# Altium PCB Hotels_Lock_Main_V1.PcbDoc (part 1 of 2)
Units mil, origin at the board's own origin, x right, y up, seen from the top; angles counter-clockwise.
Board outline 2496.06 x 2220.47 mil, 2 copper layers (Top Layer, Bottom Layer); 99 components, 77 nets, 283 pads, 104 vias.
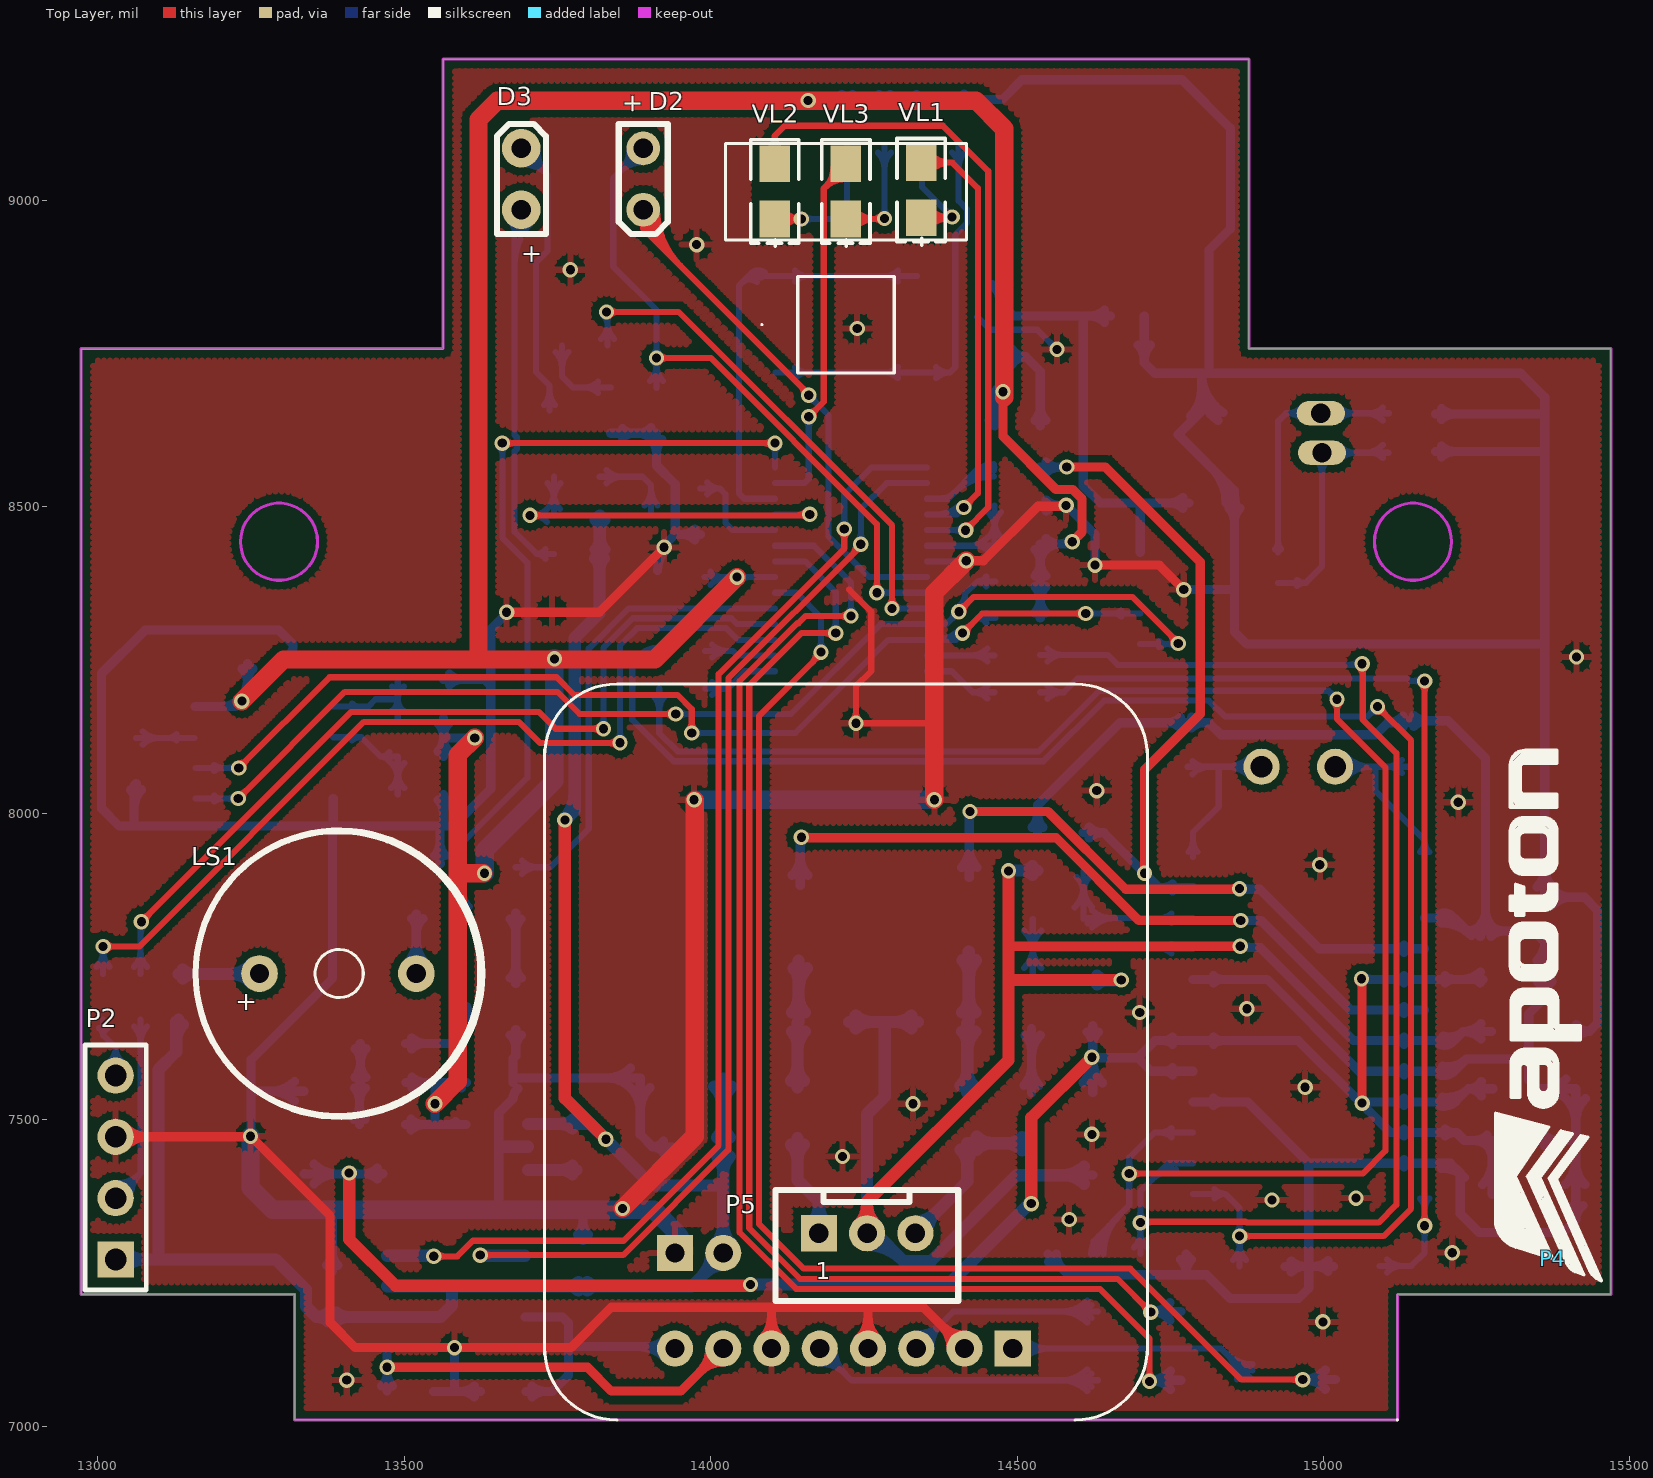
[diagram p0: Top Layer view]
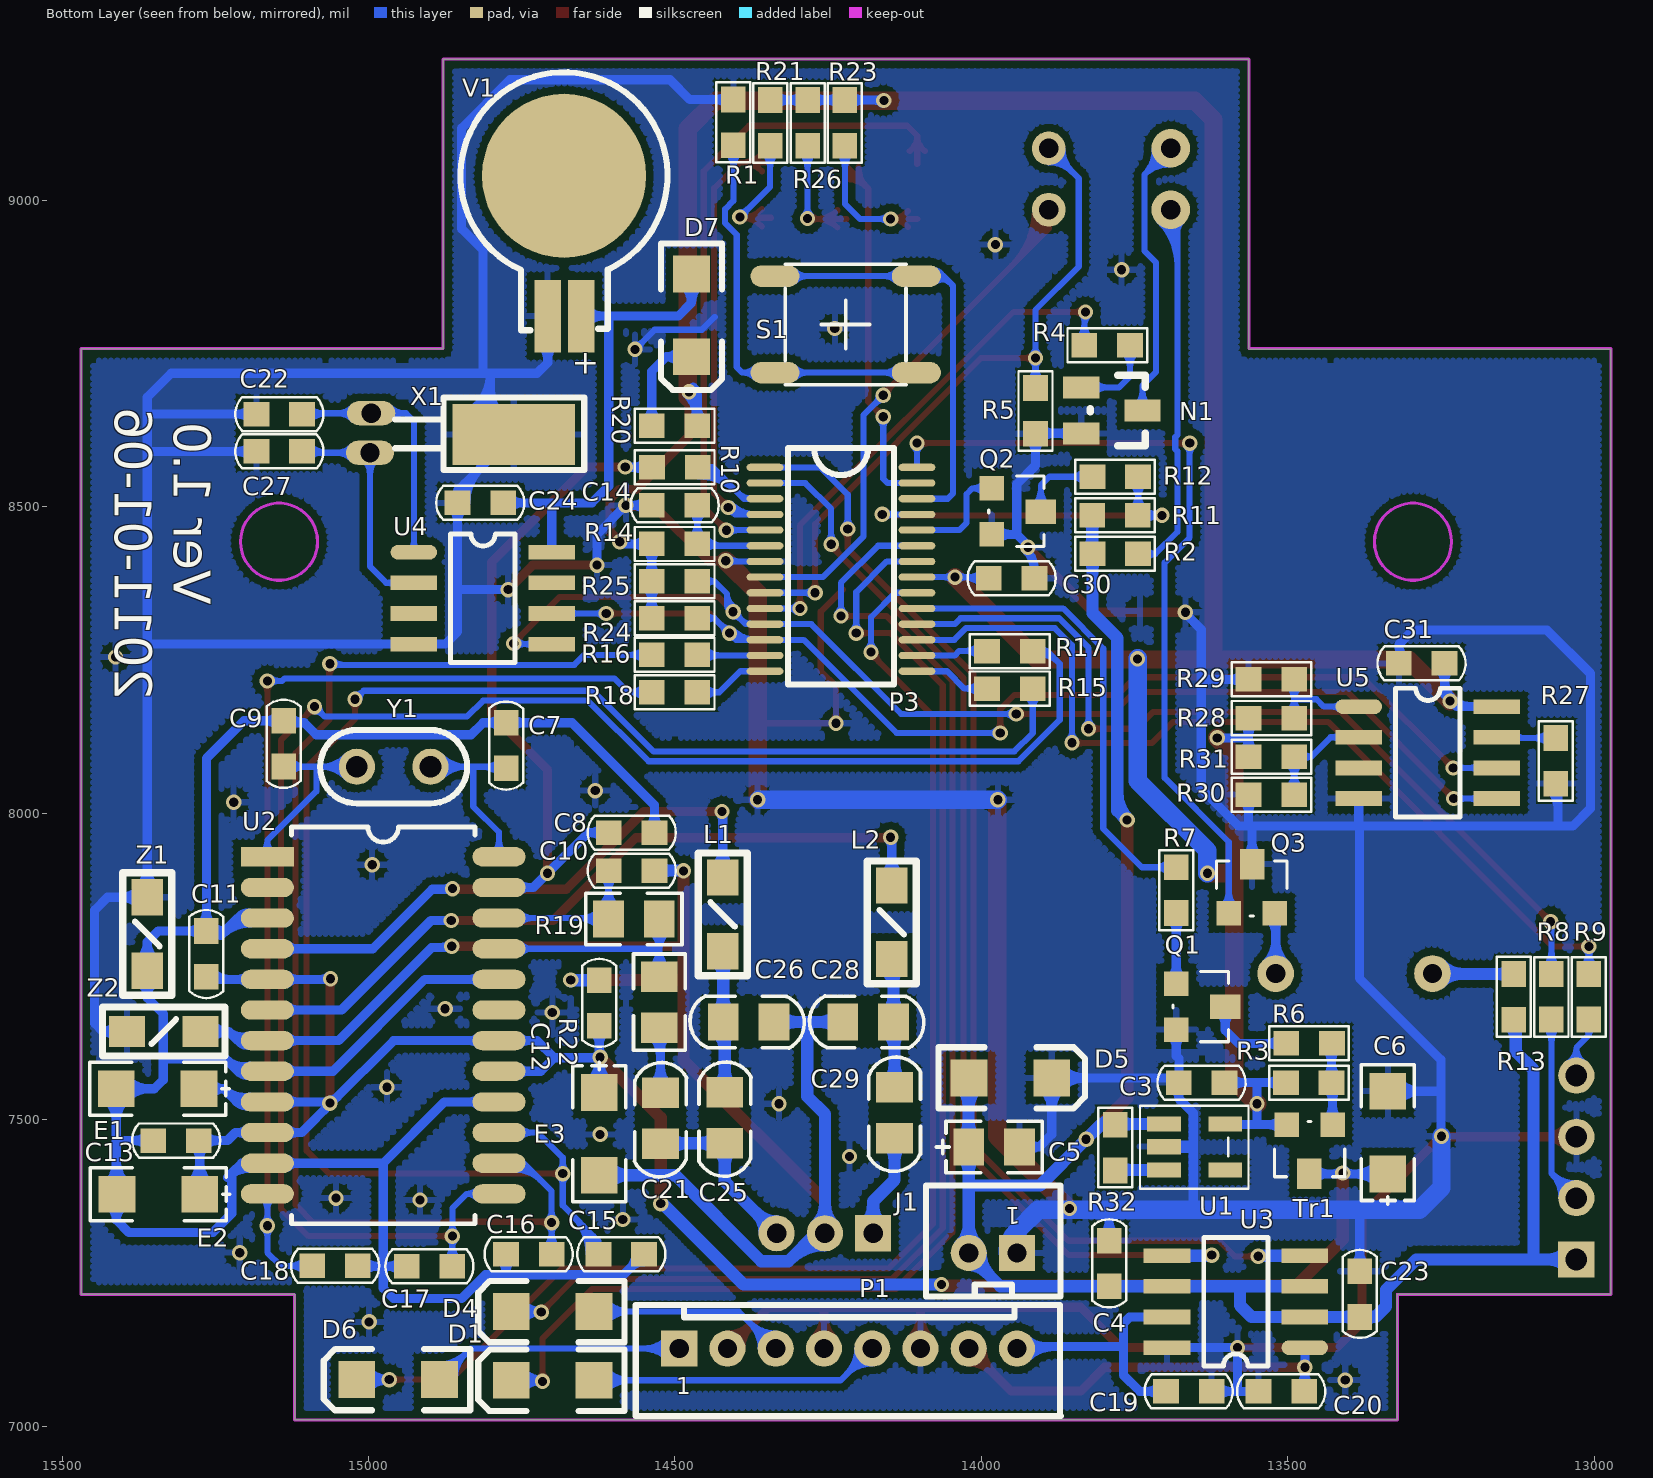
[diagram p1: Bottom Layer view, seen from below]

## Layer stack, top to bottom
Top Layer: signal copper 1.4
Dielectric: dielectric 12.6, FR-4, Dk 4.8
Bottom Layer: signal copper 1.4

## Board outline
13321.19,7010.06 13321.19,7214.79 12972.76,7214.79 12972.76,8757 13562.22,8757 13563.32,8758.09 13563.32,8826 13563.32,9230.54 14878.28,9230.54 14878.28,8758.09 15468.83,8758.09 15468.83,7214.79 15120.4,7214.79 15120.4,7010.06 13321.19,7010.06

## Design rules (kind name [scope] priority, off if disabled: settings)
Clearance Clearance_1 [InPolygon] p1: gap=12
Clearance [All] p2: gap=6
ComponentClearance [All] p1: gap=0 collisioncheckmode=3 verticalgap=0 showdistances=FALSE
FabricationTestPointUsage TestPointUsage [All] p1: valid=0 allowmultiple=FALSE
FabricationTestpoint Testpoint [All] p1: side=3 testpointundercomponent=TRUE minsize=40 maxsize=100 preferedsize=60 minholesize=0 maxholesize=40 preferedholesize=32 testpointgrid=1 allowsidetop=TRUE allowsidebottom=TRUE usegrid=TRUE gridtolerance=0.01
HoleToHoleClearance [All] p1: gap=0 allowstackedmicrovias=TRUE
MinimumSolderMaskSliver [All] p1: minsoldermaskwidth=0
PolygonConnect [All] p1: connectstyle=Relief reliefconductorwidth=10 reliefentries=4 polygonreliefangle="90 Angle"
RoutingVias [All] p1: holewidth=15 width=25 viastyle="Through Hole" minholewidth=5 minwidth=15 maxholewidth=28 maxwidth=50
SilkToSilkClearance [All] p1: silktosilkclearance=0
SilkscreenOverComponentPads [All] p1: minsilkscreentomaskgap=0
SolderMaskExpansion [All] p1: expansion=4
Width [All] p1: maxlimit=100 minlimit=6 preferedwidth=7
21 further rules are at their usual default settings.

## Components (designator, comment, footprint, x,y, rotation, side; value= is the part's Value field where it differs from the comment)
C3 "0.1uF" 0603C 13602,7559.87 r0 bottom
C4 "0.1uF" 0603C 13792,7227 r90 bottom
C5 "10uF" 0805EC 13979,7455 r180 bottom
C6 "10uF/16V" 1206EC 13337,7412 r90 bottom
C7 "15pF" 0603C 14775,8149 r270 bottom
C8 "330pF" 0603C 14609,7969 r180 bottom
C9 "15pF" 0603C 15138,8152 r270 bottom
C10 "0.01uF" 0603C 14609,7907 r180 bottom
C11 "0.1uF" 0603C 15264,7809 r270 bottom
C12 "0.1uF" 0603C 14624,7652 r90 bottom
C13 "0.1uF" 0603C 15352.44,7466.56 r180 bottom
C14 "1uF" 0603C 14538.94,8503 r180 bottom
C15 "330pF" 0603C 14626,7281.13 r180 bottom
C16 "330pF" 0603C 14700,7280 r0 bottom
C17 "330pF" 0603C 14862,7260 r0 bottom
C18 "330pF" 0603C 15093,7262 r180 bottom
C19 "0.1uF" 0603C 13623,7056 r0 bottom
C20 "0.1uF" 0603C 13472,7056 r0 bottom
C21 "47pF" 0805C 14524,7502 r270 bottom
C22 "10pF" 0603C 15184,8652 r180 bottom
C23 "0.1uF" 0603C 13383,7177 r90 bottom
C24 "2.2uF" 0603C 14779,8506 r0 bottom
C25 "30pF" 0805C 14419,7503 r270 bottom
C26 "68pF" 0805C 14380,7660 r0 bottom
C27 "10pF" 0603C 15184,8591 r180 bottom
C28 "68pF" 0805C 14185,7660 r0 bottom
C29 "30pF" 0805C 14142,7511 r270 bottom
C30 "0.1uF" 0603C 13989,8384 r180 bottom
C31 "0.1uF" 0603C 13243,8244 r0 bottom
D1 "4148" 1206D_1 14767,7075 r180 bottom
D2 "LED" LED1_R 13890,9083 r270 top locked
D3 "LED" LED1_S 13692,8985 r90 top locked
D4 "4148" 1206D_1 14767,7187 r180 bottom
D5 "DIODE" 1206D_1 13885,7568 r0 bottom
D6 "4148" 1206D_1 15019,7076 r180 bottom
D7 "4148" 1206D_1 14473,8745 r90 bottom
E1 "100uF" 1206EC 15277,7550 r0 bottom
E2 "100uF" 1206EC 15276,7378 r0 bottom
E3 "100uF" 1206EC 14623,7544 r270 bottom
J1 "CON2" CON2-2 13942.23,7282 r0 bottom locked
L1 "1uH" L1 14422,7835 r270 bottom
L2 "1uH" L1 14146,7822 r270 bottom
LS1 "CON2" BUZA_M 13264,7739 r0 top locked
N1 "8550" ST-SOT23 13837,8695 r270 bottom
P1 "Header 8" CON8-2 14493,7126 r180 bottom
P2 "Header 4" HDR1X4 13029,7272 r90 top
P3 "U10" TSSOP28 14229,8596 r270 bottom
P4 "LOGO" LOGO_apoton 15374,7273 r90 top
P5 "Header 3" CON3-2 14177,7315 r0 top
Q1 "9013" SOT-23 13682,7722 r270 bottom
Q2 "8050" SOT-23 13983,8530 r270 bottom
Q3 "8050" SOT-23 13596,7837 r180 bottom
R1 "220" 0603R 14405,9089 r90 bottom
R2 "51" 0603R 13743,8422.68 r0 bottom
R3 "10K" 0603R 13504,7561 r180 bottom
R4 "2.2K" 0603R 13833,8764 r180 bottom
R5 "2.2K" 0603R 13911,8695 r270 bottom
R6 "1K" 0603R 13426.7,7624 r0 bottom
R7 "4.7K" 0603R 13681,7913 r270 bottom
R8 "220" 0603R 13069,7739 r270 bottom
R9 "220" 0603R 13008,7739 r270 bottom
R10 "201" 0603R 14461.7,8564 r0 bottom
R11 "200K" 0603R 13820.3,8486.68 r180 bottom
R12 "100K" 0603R 13743,8548.68 r0 bottom
R13 "10" 0603R 13132,7662 r90 bottom
R14 "100K" 0603R 14539,8440 r180 bottom
R15 "201" 0603R 13915,8203 r0 bottom
R16 "201" 0603R 14539,8259 r180 bottom
R17 "201" 0603R 13915,8264 r0 bottom
R18 "201" 0603R 14539,8198 r180 bottom
R19 "821" 0805R 14567,7828 r0 bottom
R20 "201" 0603R 14539,8633 r180 bottom
R21 "1K" 0603R 14344,9165 r270 bottom
R22 "1K" 0805R 14525,7692 r90 bottom
R23 "1K" 0603R 14222,9165 r270 bottom
R24 "10K" 0603R 14539,8319 r180 bottom
R25 "10K" 0603R 14539,8379 r180 bottom
R26 "1K" 0603R 14283,9165 r270 bottom
R27 "201" 0603R 13062,8124 r270 bottom
R28 "201" 0603R 13565,8156 r180 bottom
R29 "201" 0603R 13565,8219 r180 bottom
R30 "201" 0603R 13565,8031 r180 bottom
R31 "201" 0603R 13565,8093 r180 bottom
R32 "10K" 0603R 13782,7416 r90 bottom
S1 "SW-PB" KEY-B4 14106,8876.48 r270 bottom locked
Tr1 "SI2301" SOT-23 13427,7492 r0 bottom
U1 "XC6201P332MR" SOT-25 13702,7493 r270 bottom
U2 "FM1702SL" SO24W 15165,7929 r180 bottom
U3 "BA6287F" SOP-8 13472,7128 r0 bottom
U4 "PCF8563T" SOP-8 14926,8426 r180 bottom
U5 "AT24C128SO8" SOP-8 13384,8174 r180 bottom
V1 "BAT" SMBAT 14653,8811 r180 bottom
VL1 "LED_G" 0805EC_2 14343,8972 r90 top locked
VL2 "LED_G" 0805EC_2 14104,8970 r90 top locked
VL3 "LED_G" 0805EC_2 14220,8970 r90 top locked
X1 "32768" XTAL3 14998,8589 r270 bottom
Y1 "13.56MHz" CIZHU 15019,8076 r180 bottom
Z1 "RH354708" L1 15361,7803 r90 bottom
Z2 "RH354708" L1 15334,7644 r0 bottom

## Footprints (in the part's own frame and the unit in brackets; to place one, negate y for a bottom-side part, rotate by r counter-clockwise, add the part's x,y. Pads: shape width x height; smd on the part's side, far side on the other; paste and mask are expansions set on the pad)
0603C [mil]
  rect 42x40 smd: 1(1.15,-0.57) 2(75.61,-0.57)
  silkscreen extent -33,-28 110,27
0603R [mil]
  rect 42x40 smd: 1(1.15,-0.57) 2(75.61,-0.57)
  silkscreen extent -26,-28 104,27
0805C [mil]
  rect 50x60 smd: 1(-41.72,0.49) 2(41.28,0.49)
  silkscreen extent -91,-42 95,43
0805EC [mil]
  rect 50x60 smd: 1(-41.72,0.49) 2(41.28,0.49)
  silkscreen extent -95,-42 78,43
0805EC_2 [mil]
  rect 60x50 smd: 1(-0.19,-0.49) 2(89.81,-0.49)
  silkscreen extent -45,-40 129,39
0805R [mil]
  rect 50x60 smd: 1(-41.72,0.49) 2(41.28,0.49)
  silkscreen extent -79,-42 78,43
1206D_1 [mil]
  rect 60x60 smd: 1(-0.05,-0.13) 2(134.95,-0.13)
  silkscreen extent -54,-50 185,50
1206EC [mil]
  rect 60x60 smd: 1(-0.5,-0.41) 2(134.5,-0.41)
  silkscreen extent -50,-44 178,43
BUZA_M [mil]
  round 60 hole 31.5: 1(-0.24,-0.55) 2(255.66,-0.55)
  silkscreen extent -105,-233 360,232
CIZHU [mm]
  round 1.5 hole 0.9: 1(0,0) 2(3.048,0)
  silkscreen extent -1.52,-1.52 4.57,1.52
CON2-2 [mm]
  rect 1.5x1.5 hole 0.8: 1(-0.012,-0.012)
  round 1.5 hole 0.8: 2(1.988,-0.012)
  silkscreen extent -1.81,-2.81 3.76,1.79
CON3-2 [mm]
  rect 1.5x1.5 hole 0.8: 1(-0.012,-0.01)
  round 1.5 hole 0.8: 2(1.988,-0.01) 3(3.988,-0.01)
  silkscreen extent -1.81,-2.81 5.76,1.79
CON8-2 [mm]
  rect 1.5x1.5 hole 0.8: 1(0.001,0.013)
  round 1.5 hole 0.8: 2(2.001,0.013) 3(4.001,0.013) 4(6.001,0.013) 5(8.001,0.013) 6(10.001,0.013) 7(12.001,0.013) 8(14.001,0.013)
  silkscreen extent -1.8,-2.79 15.82,1.81
HDR1X4 [mm] "Connector; Header; 4 Position"
  rect 1.5x1.5 hole 0.9: 1(0,0)
  round 1.5 hole 0.9: 2(2.54,0) 3(5.08,0) 4(7.62,0)
  silkscreen extent -1.27,-1.27 8.89,1.27
KEY-B4 [mil]
  oval 35x80 smd: 1(0,-230.7) 1(0,0) 2(157.48,-230.7) 2(157.48,0)
  silkscreen extent -20,-214 177,-17
L1 [mm]
  rect 1.5x1.3 smd: 1(-1.524,0) 2(1.524,0)
  silkscreen extent -2.54,-1.02 2.54,1.02
LED1_R [mm]
  round 1.4 hole 0.8: 1(-0.051,0) 2(2.489,0)
  silkscreen extent -1.07,-1.02 3.51,1.02
LED1_S [mm]
  round 1.6 hole 0.8: 1(2.54,0.025) 2(0,0.025)
  silkscreen extent -1.02,-0.99 3.56,1.04
LOGO_apoton [mil]
  silkscreen extent -36,-80 830,94
SMBAT [mm]
  rect 1.1x3 smd: 1(0.012,0.009) 2(-1.388,0.009)
  round 6.8 smd: ""(-0.709,5.825)
  silkscreen extent -5,-0.58 3.58,10.11
SO24W [mm]
  rect 2.2x0.8 smd: 1(0,0)
  oval 2.2x0.8 smd: 2(0,-1.27) 3(0,-2.54) 4(0,-3.81) 5(0,-5.08) 6(0,-6.35) 7(0,-7.62) 8(0,-8.89) 9(0,-10.16) 10(0,-11.43) 11(0,-12.7) 12(0,-13.97) 13(9.6,-13.97) 14(9.6,-12.7) 15(9.6,-11.43) 16(9.6,-10.16) 17(9.6,-8.89) 18(9.6,-7.62) 19(9.6,-6.35) 20(9.6,-5.08) 21(9.6,-3.81) 22(9.6,-2.54) 23(9.6,-1.27) 24(9.6,0)
  silkscreen extent 1,-15.21 8.6,1.24
SOP-8 [mil]
  oval 76x24 smd: 1(0,0)
  rect 76x24 smd: 2(0,-50) 3(0,-100) 4(0,-150) 5(225,-150) 6(225,-100) 7(225,-50) 8(225,0)
  silkscreen extent 60,-180 165,30
SOT-23 [mil]
  rect 40x40 smd: 1(-0.14,0.11) 2(74.87,0.11)
  rect 40x50 smd: 3(37.87,80.11)
  silkscreen extent -20,-5 95,85
SOT-25 [mil]
  rect 25x55 smd: 1(0,0) 2(37,0) 3(75,0) 4(75,100) 5(0,100)
  silkscreen extent -30,-39 106,138
ST-SOT23 [mil]
  rect 36x59.05 smd: B(0,0) C(38,100) E(75,0)
  silkscreen extent -20,15 95,105
TSSOP28 [mil]
  oval 11.81x60 smd: 1(31.5,-124) 2(57.09,-124) 3(82.68,-124) 4(108.27,-124) 5(133.86,-124) 6(159.45,-124) 7(185.04,-124) 8(210.63,-124) 9(236.22,-124) 10(261.81,-124) 11(287.4,-124) 12(312.99,-124) 13(338.58,-124) 14(364.17,-124) 15(364.17,124) 16(338.58,124) 17(312.99,124) 18(287.4,124) 19(261.81,124) 20(236.22,124) 21(210.63,124) 22(185.04,124) 23(159.45,124) 24(133.86,124) 25(108.27,124) 26(82.68,124) 27(57.09,124) 28(31.5,124)
  silkscreen extent 0,-87 386,87
XTAL3 [mm]
  rect 2.54x5.08 smd: 0(-0.738,5.969)
  oval 1x2 hole 0.8: 1(0.018,0.012) 2(-1.622,0.06)
  silkscreen extent -2.27,1.06 0.73,8.89

## Part data
C3 C4 C7 C8 C9 C10 C14 C15 C16 C17 C18 C21 C22 C24 C25 C26 C27 C28 C29: library part CAP, "Capacitor"
C5 C6: library part ELECTRO1, "Electrolytic Capacitor"
C11 C12 C13 C19 C20 C23 C30 C31: library part CAP
D1 D4 D6 D7: library part DIODE, "Diode"
D2: library part LED_1
D5: "Diode"
E1 E2 E3: library part "CAPACITOR POL"
J1: "Connector"
L1 L2: library part INDUCTOR
LS1: library part SPEAKER
N1 Q1 Q2 Q3: library part NPN, "NPN Transistor"
P1: "Header, 8-Pin"
P2: "Header, 4-Pin"
P3: library part P89LPC930_931
P4: library part Plug, "Plug"
P5: "Header, 3-Pin"
R1 R2 R3 R4 R5 R6 R7 R8 R9 R11 R12 R13 R32: library part RES2
R10 R15 R16 R17 R18 R19 R20 R22 R24 R25 R27 R28 R29 R30 R31: library part RES1
R14 R21 R23 R26: library part Res2, "Resistor"
U1: library part XC6204
U3: library part Component_1
V1: library part "DIAN SHI"
VL1 VL2 VL3: library part LED1
X1 Y1: library part CRYSTAL, "Crystal"
Z1 Z2: library part Z

## Via types
v1: diameter 25, hole 15, Top Layer to Bottom Layer, tented both sides, 104 vias

## Nets (pads, with @x,y where several pads share a name; then routed paths per layer and width w, separated by ;. In a path a pad name is that pad's centre, name@x,y a point inside that pad or via, vN(x,y) a via of type N, cw(c..) or ccw(c..) an arc to the next point about the centre after c; other vN are vias at no path point)
+3.3V_MF: C6.1 C11.2 C12.1 C13.2 E1.1 E2.1 E3.1 Tr1.3 U2.5 U2.9 U2.10 U2.17 U2.18 | length 4400.2
  Top Layer w15: v1@15058.46,7726.46 cw(c15047.51,7715.51) 15063,7715.51 ; v1(15062,7730) 15063,7729 v1(15063,7527)
  Top Layer w20: v1(13410,7413) 13410,7305 13486,7229 v1@14066,7229 ; v1(14523,7363) 14523,7503 v1(14622,7602)
  Bottom Layer w15: C6.1@13336.97,7411.89 C6.1@13336.59,7411.5 13464.48,7411.5 Tr1.3@13464.87,7411.89 ; C6.1@13352.5,7395.59 cw(c13390.91,7357.18) 13390.91,7411.5 cw(c13390.91,7465.82) C6.1@13352.5,7427.41 ; 13394.31,7411.5 ccw(c13394.31,7428.69) v1@13406.46,7416.54 ; v1@13413.54,7416.54 ccw(c13425.69,7428.69) 13425.69,7411.5 ; 13433.75,7411.5 ccw(c13433.75,7443) Tr1.3@13456.03,7420.73 ; 13435.62,7411.5 cw(c13435.62,7382.65) Tr1.3@13456.03,7403.05 ; E3.1@14607.5,7560.41 ccw(c14569.04,7598.87) v1@14623.43,7598.87 ; C12.1@14614.6,7643.31 cw(c14593.26,7621.97) 14623.43,7621.97 cw(c14653.61,7621.97) C12.1@14632.27,7643.31 ; v1@14618.46,7598.46 cw(c14606.46,7586.46) 14623.43,7586.46 ; v1@14618.46,7605.54 ccw(c14606.46,7617.54) 14623.43,7617.54 ; E3.1@14623.41,7544.5 v1@14623.43,7601 ; v1@14623.43,7598.76 ccw(c14677.68,7598.76) E3.1@14639.32,7560.41 ; C12.1@14623.43,7653.15 v1@14623.43,7601 ; v1@14625.54,7605.54 ccw(c14636.49,7616.49) 14636.49,7601 ; U2.17@14753.66,7573.17 ccw(c14739.58,7559.09) 14739.58,7579 ccw(c14739.58,7598.91) U2.17@14753.66,7584.83 ; U2.18@14753.66,7623.17 ccw(c14739.58,7609.09) 14739.58,7629 ccw(c14739.58,7648.91) U2.18@14753.66,7634.83 ; U2.17@14787.05,7579 14719,7579 14697,7601 ; U2.18@14820.44,7623.17 cw(c14834.52,7609.09) 14834.52,7629 cw(c14834.52,7648.91) U2.18@14820.44,7634.83 ; 15051.05,7536.95 ccw(c15063,7548.9) v1@15063,7532 ; v1@15063,7729 U2.5@15165,7729 C11.2@15260.18,7729 ; v1@15065.54,7733.54 ccw(c15076.49,7744.49) 15076.49,7729 ; v1@15066.54,7523.46 cw(c15079.9,7510.1) 15079.9,7529 ; v1@15068,7527 ccw(c15084.9,7527) 15072.95,7515.05 ; U2.10@15131.61,7473.17 ccw(c15117.53,7459.09) 15117.53,7479 ccw(c15117.53,7498.91) U2.10@15131.61,7484.83 ; U2.9@15131.61,7523.17 ccw(c15117.53,7509.09) 15117.53,7529 ccw(c15117.53,7548.91) U2.9@15131.61,7534.83 ; U2.5@15131.61,7723.17 ccw(c15117.53,7709.09) 15117.53,7729 ccw(c15117.53,7748.91) U2.5@15131.61,7734.83 ; U2.9@15191.37,7522.35 ccw(c15196.32,7549.91) 15216.11,7530.11 ; U2.9@15194.02,7537.12 ccw(c15202.5,7584.33) 15236.41,7550.41 ; U2.10@15198.39,7473.17 cw(c15212.47,7459.09) 15212.47,7479 cw(c15212.47,7498.91) U2.10@15198.39,7484.83 ; U2.9@15198.39,7523.17 cw(c15212.47,7509.09) 15212.47,7529 cw(c15212.47,7548.91) U2.9@15198.39,7534.83 ; U2.5@15198.39,7723.17 cw(c15212.47,7709.09) 15212.47,7729 cw(c15212.47,7748.91) U2.5@15198.39,7734.83 ; 15226.21,7729 ccw(c15226.21,7770.74) C11.2@15255.73,7741.22 ; 15242.56,7729 cw(c15242.56,7710.38) C11.2@15255.73,7723.55 ; E1.1@15257.3,7538.69 ccw(c15236.41,7525.95) 15236.41,7550.41 ; E1.1@15257.3,7562.13 cw(c15236.41,7574.88) 15236.41,7550.41 ; E2.1@15259.59,7394.32 ccw(c15221.18,7432.73) 15275.5,7432.73 ccw(c15329.82,7432.73) E2.1@15291.41,7394.32 ; C13.2@15266.99,7474.83 cw(c15245.65,7496.17) 15245.65,7465.99 cw(c15245.65,7435.81) 15266.99,7457.15 cw(c15246.44,7436.6) 15275.5,7436.6 ; 15275.5,7435.03 cw(c15306.79,7435.03) C13.2@15284.67,7457.15 ; C13.2@15275.5,7464.67 E2.1@15275.5,7378.41 E2.1@15276.83,7379.74 ; E1.1@15276.5,7550.41 15236.41,7550.41 ; C13.2@15276.83,7465.99 15230.01,7465.99 15217,7479 U2.10@15165,7479 15109,7479 v1@15059,7529 ; v1@14623.43,7601 14697,7601 ; 14697,7601 14725,7629 U2.18@14787.05,7629 14959,7629 v1@15059,7529 ; v1@15059,7529 U2.9@15165,7529 15215,7529 15236.41,7550.41
  Bottom Layer w20: v1(14065,7231) 14388,7231 v1@14521,7364
ANT1: C21.2 C25.2 P5.3 | length 530.8
  Bottom Layer w20: P5.3@14333.99,7314.61 14418.51,7399.14 C25.2@14418.51,7461.72 C21.2@14522.51,7461.72 ; P5.3@14333.99,7334.14 ccw(c14333.99,7381.28) 14367.32,7347.95 ccw(c14400.66,7314.61) P5.3@14353.52,7314.61 ; C25.2@14407.91,7451.11 cw(c14382.3,7425.51) 14418.51,7425.51 cw(c14454.73,7425.51) C25.2@14429.12,7451.11 ; C25.2@14434.12,7451.11 cw(c14459.73,7425.51) 14459.73,7461.72 cw(c14459.73,7497.93) C25.2@14434.12,7472.33 ; 14479.88,7461.72 cw(c14479.88,7422.09) C21.2@14507.91,7450.12 ; 14484.71,7461.72 ccw(c14484.71,7494.52) C21.2@14507.91,7471.33
ANT2: C29.2 P5.1 | length 300.5
  Bottom Layer w20: C29.2@14130.91,7459.11 cw(c14105.3,7433.51) 14141.51,7433.51 cw(c14177.73,7433.51) C29.2@14152.12,7459.11 ; C29.2@14141.51,7469.72 14141.51,7401.49 14176.51,7366.49 P5.1@14176.51,7314.61 ; P5.1@14162.7,7328.42 ccw(c14129.36,7361.76) 14176.51,7361.76 ccw(c14223.65,7361.76) P5.1@14190.32,7328.42
BEEP: P3.28 Q3.1 | length 1482.5
  Top Layer w10: v1(13660,8604) v1(14105,8604) ; v1@13665.3,8598.7 cw(c13678.11,8585.89) 13678.11,8604 cw(c13678.11,8622.11) v1@13665.3,8609.3 ; v1@14099.7,8598.7 ccw(c14086.89,8585.89) 14086.89,8604 ccw(c14086.89,8622.11) v1@14099.7,8609.3
  Bottom Layer w10: Q3.1@13585.53,7847.72 ccw(c13559.92,7873.32) 13596.14,7873.32 ccw(c13632.35,7873.32) Q3.1@13606.74,7847.72 ; Q3.1@13596.14,7837.11 13596.14,7953.14 13701,8058 13701,8409 13660,8450 v1(13660,8604) ; v1@13654.7,8598.7 cw(c13641.89,8585.89) 13660,8585.89 cw(c13678.11,8585.89) v1@13665.3,8598.7 ; v1@14099.7,8598.7 cw(c14086.89,8585.89) 14105,8585.89 cw(c14123.11,8585.89) v1@14110.3,8598.7 ; P3.28@14105,8564.5 v1(14105,8604)
DRIVE1: C20.1 P1.7 U3.1 | length 794.7
  Top Layer w15: v1(13472,7096) 13799,7096 13838,7057 13951.04,7057 P1.7@14020.54,7126.5 ; P1.7@13998.51,7126.5 cw(c13945.33,7126.5) 13982.93,7088.9 cw(c14020.54,7051.29) P1.7@14020.54,7104.47
  Bottom Layer w15: C20.1@13463.31,7065.4 ccw(c13442.32,7086.39) v1@13472,7086.39 ; C20.1@13472,7057.71 v1(13472,7096) U3.1@13472,7128 ; v1@13472,7087.1 ccw(c13502.68,7087.1) C20.1@13480.99,7065.4
DRIVE2: C19.2 P1.8 U3.7 | length 541.7
  Bottom Layer w15: U3.7@13697,7178 13758,7178 13768,7168 13768,7130 ; C19.2@13698.61,7056.57 13741.57,7056.57 13768,7083 13768,7130 ; C19.2@13708.45,7047.73 cw(c13729.79,7026.39) 13729.79,7056.57 cw(c13729.79,7086.74) C19.2@13708.45,7065.4 ; 13880.16,7130 cw(c13880.16,7064.87) P1.8@13926.22,7110.92 ; 13897.07,7130 ccw(c13897.07,7171.23) P1.8@13926.22,7142.07 ; P1.8@13938.29,7130 13768,7130
FIN: P3.1 U3.4 | length 2000.9
  Top Layer w10: v1(13548,7277) 13586.5,7277 13612,7302.5 13857.87,7302.5 14013,7457.63 14013,8226.88 14218,8431.88 v1(14218,8464) ; v1@13553.3,7271.7 cw(c13566.11,7258.89) 13566.11,7277 cw(c13566.11,7295.11) v1@13553.3,7282.3 ; v1@14212.7,8458.7 cw(c14199.89,8445.89) 14218,8445.89 cw(c14236.11,8445.89) v1@14223.3,8458.7
  Bottom Layer w10: v1@14212.7,8469.3 ccw(c14199.89,8482.11) 14218,8482.11 ccw(c14236.11,8482.11) v1@14223.3,8469.3 ; v1(14218,8464) 14218,8520 14262.5,8564.5 P3.1@14353,8564.5
  Bottom Layer w20: U3.4@13472,7278 v1@13547,7278
GND: C3.2 C4.2 C5.2 C6.2 C14.1 C19.1 C20.2 C22.1 C23.2 C24.2 C27.1 C30.2 C31.2 D5.1 J1.1 N1.E P1.2 P1.4 P1.6 P2.3 P3.7 Q1.2 Q2.2 Q3.3 R1.2 R5.2 R27.2 R29.1 R30.1 U1.2 U3.8 U4.4 U5.4 V1.2 X1.0 Z1.2 Z2.2 | length 15949.6
  Top Layer w10: 14226,8365 14262,8329 14262,8232 14237,8207 v1(14237,8147) 14357,8147 14365,8155 ; v1@14231.7,8152.3 ccw(c14218.89,8165.11) 14237,8165.11 ccw(c14255.11,8165.11) v1@14242.3,8152.3
  Top Layer w15: P2.3@13029,7472 v1@13249,7472 ; P2.3@13044.58,7456.42 cw(c13082.18,7418.82) 13082.18,7472 cw(c13082.18,7525.18) P2.3@13044.58,7487.58 ; v1@13250,7472 13379,7343 13379,7169 13420,7128 v1(13582,7128) 13772,7128 13838,7194 14346.74,7194 P1.2@14414.24,7126.5 ; v1(13667,8328) 13818,8328 v1(13924,8434) ; P1.6@14083.7,7142.07 ccw(c14046.1,7179.68) 14099.28,7179.68 ccw(c14152.45,7179.68) P1.6@14114.85,7142.07 ; P1.6@14099.28,7126.5 14099.28,7189.72 ; P1.4@14241.18,7142.07 ccw(c14203.58,7179.68) 14256.76,7179.68 ccw(c14309.94,7179.68) P1.4@14272.33,7142.07 ; P1.4@14256.76,7126.5 14256.76,7191.76 ; P1.2@14392.21,7126.5 ccw(c14339.03,7126.5) 14376.63,7164.1 ccw(c14414.24,7201.71) P1.2@14414.24,7148.53 ; v1(14417,8412) 14445,8412 14534,8501 14585,8501 14583.57,8502.43 v1(14580,8502.43) ; 14564.46,8501 ccw(c14564.46,8517.97) v1@14576.46,8505.97 ; v1(14627,8405) 14732,8405 v1(14772,8365)
  Top Layer w30: v1(13856,7355) 13974,7473 v1@13974,8021 ; v1(14365,8022) 14365,8155 14365,8360 v1(14417,8412)
  Bottom Layer w10: P3.7@14353,8410.96 v1@14415.96,8410.96 ; 14396.38,8410.96 ccw(c14396.38,8432.62) v1@14411.7,8417.3 ; 14401.4,8410.96 cw(c14401.4,8396.4) v1@14411.7,8406.7 ; 14435,8810 14456,8789 14533,8789 v1(14565,8757) ; v1@14557.5,8757 ccw(c14539.39,8757) 14552.2,8769.8 ccw(c14565,8782.61) v1@14565,8764.5
  Bottom Layer w15: R27.2@13053.73,8038.55 cw(c13040.99,8025.81) 13059,8025.81 ; 13059,8008.6 cw(c13101.35,8008.6) R27.2@13071.4,8038.55 ; R27.2@13062.57,8048.39 13059,8044.82 13059,7979 ; v1@13250,7473 13250,7546.5 ; C31.2@13309.78,8253.4 ccw(c13288.44,8274.74) 13318.61,8274.74 ; 13318.61,8275.39 13295,8299 13077,8299 13006,8228 13006,8008 13035,7979 13059,7979 ; C6.2@13320.68,7530.59 ccw(c13282.27,7492.18) 13282.27,7546.5 ccw(c13282.27,7600.82) C6.2@13320.68,7562.41 ; C6.2@13336.59,7546.5 13250,7546.5 ; C23.2@13373.6,7262.45 ccw(c13352.26,7283.79) 13382.43,7283.79 ccw(c13412.61,7283.79) C23.2@13391.27,7262.45 ; C23.2@13382.43,7252.61 13382.43,7350.57 ; 13384,7980 U5.4@13384,8024 ; C20.2@13547.61,7056.57 13582,7056.57 ; Q3.3@13549.3,7930.95 ccw(c13527.96,7952.29) 13558.13,7952.29 ccw(c13588.31,7952.29) Q3.3@13566.97,7930.95 ; R30.1@13555.01,8021.6 cw(c13533.68,8000.26) 13563.85,8000.26 cw(c13594.03,8000.26) R30.1@13572.69,8021.6 ; 13558.13,7973.28 Q3.3@13558.13,7917.11 Q3.3@13559,7917.97 ; R30.1@13563.85,8030.43 13563.85,7979 ; R29.1@13563.85,8218.43 13630.57,8218.43 13641,8208 ; R29.1@13573.69,8209.6 cw(c13595.03,8188.26) 13595.03,8218.43 cw(c13595.03,8248.61) R29.1@13573.69,8227.27 ; C19.1@13614.31,7047.73 ccw(c13592.97,7026.39) 13592.97,7056.57 ccw(c13592.97,7086.74) C19.1@13614.31,7065.4 ; C19.1@13624.15,7056.57 13582,7056.57 ; 13654,7357 13654,7511 13677.61,7534.61 cw(c13698.03,7534.62) C3.2@13685.37,7550.63 ; v1@13668,8327 13641,8300 13641,8208 ; Q1.2@13673.05,7638.3 cw(c13651.71,7616.96) 13681.89,7616.96 cw(c13712.07,7616.96) Q1.2@13690.73,7638.3 ; C3.2@13677.61,7560.43 13677.61,7599.72 ; 13681.89,7604 Q1.2@13681.89,7647.13 ; C3.2@13685.31,7568.13 D5.1@13884.95,7568.13 13884.95,7476.05 13905.51,7455.49 ; U3.8@13697,7128 v1(13582,7128) 13582,7056.57 ; C4.2@13782.6,7312.45 ccw(c13761.26,7333.79) 13791.43,7333.79 ccw(c13821.61,7333.79) C4.2@13800.27,7312.45 ; C4.2@13791.43,7302.61 13791.43,7352.57 ; N1.E@13837,8620 R5.2@13910.95,8620 ; N1.E@13855.95,8612.58 cw(c13873.88,8594.65) 13873.88,8620 cw(c13873.88,8645.35) N1.E@13855.95,8627.42 ; D5.1@13869.04,7584.04 cw(c13830.63,7622.45) 13830.63,7568.13 cw(c13830.63,7513.81) 13869.04,7552.22 cw(c13830.63,7513.81) 13884.95,7513.81 cw(c13939.27,7513.81) D5.1@13900.86,7552.22 ; 13880.46,8620 ccw(c13880.46,8651.49) R5.2@13902.73,8629.22 ; 13882.32,8620 cw(c13882.32,8591.14) R5.2@13902.73,8611.55 ; R5.2@13902.73,8609.55 cw(c13881.39,8588.21) 13911.57,8588.21 cw(c13941.74,8588.21) R5.2@13920.4,8609.55 ; R5.2@13911.57,8619.39 13911.57,8567.43 13942.13,8536.87 13942.13,8455.13 ; C30.2@13913.39,8396.3 cw(c13961.7,8396.3) v1@13927.54,8430.46 ; v1@13922.5,8435.5 13942.13,8455.13 ; C5.2@13923.04,7445.97 ccw(c13905.51,7434.6) 13905.51,7455.49 ; C5.2@13923.04,7465.01 cw(c13905.51,7476.38) 13905.51,7455.49 ; C5.2@13937.72,7455.49 13905.51,7455.49 ; Q2.2@13974.05,8446.3 ccw(c13952.71,8424.96) 13952.71,8455.13 ccw(c13952.71,8485.31) Q2.2@13974.05,8463.97 ; Q2.2@13982.89,8455.13 13942.13,8455.13 ; R1.2@14404.43,9164.61 14475.61,9164.61 14508,9197 14769,9197 14848,9118 14848,8954 14813,8919 14813,8718 ; R1.2@14413.27,9155.78 cw(c14434.61,9134.44) 14434.61,9164.61 cw(c14434.61,9194.79) R1.2@14413.27,9173.45 ; C14.1@14537.8,8502.43 v1(14580,8502.43) ; C14.1@14547.63,8493.6 cw(c14568.97,8472.26) 14568.97,8502.43 cw(c14568.97,8532.61) C14.1@14547.63,8511.27 ; v1@14585,8503 14584.43,8502.43 v1(14580,8502.43) ; v1(14627,8405) 14627,8455.43 v1(14580,8502.43) ; V1.2@14697.63,8763.95 cw(c14673.47,8739.79) 14707.64,8739.79 cw(c14741.81,8739.79) V1.2@14717.65,8763.95 ; V1.2@14707.64,8811.36 14707.64,8735.36 14725,8718 14801,8718 ; v1(14772,8365) 14851.61,8365 ; X1.0@14782.95,8648.11 ccw(c14739.37,8691.7) 14801,8691.7 ; X1.0@14801,8660.06 14801,8718 ; 14801,8690.49 ccw(c14859.65,8690.49) X1.0@14827.89,8641.18 ; X1.0@14803,8658.06 X1.0@14763,8618.06 14854.61,8526.45 C24.2@14854.61,8506.57 14854.61,8296.39 14875,8276 U4.4@14926,8276 15361,8276 ; 14817.51,8563.55 cw(c14760.52,8506.57) C24.2@14841.11,8506.57 ; X1.0@14836.01,8653.79 cw(c14877.37,8718) 14801,8718 ; 14843.11,8537.95 cw(c14811.73,8506.57) C24.2@14856.11,8506.57 ; C24.2@14845.78,8497.73 cw(c14824.44,8476.39) 14854.61,8476.39 cw(c14884.79,8476.39) C24.2@14863.45,8497.73 ; C27.1@15182.85,8590.43 15360.43,8590.43 ; C22.1@15182.85,8651.43 15360.57,8651.43 ; C27.1@15192.69,8581.6 cw(c15214.03,8560.26) 15214.03,8590.43 cw(c15214.03,8620.61) C27.1@15192.69,8599.27 ; C22.1@15192.69,8642.6 cw(c15214.03,8621.26) 15214.03,8651.43 cw(c15214.03,8681.61) C22.1@15192.69,8660.27 ; Z1.2@15348.21,7879.73 ccw(c15317.33,7910.61) 15361,7910.61 ccw(c15404.67,7910.61) Z1.2@15373.79,7879.73 ; Z1.2@15373.79,7850.21 cw(c15404.67,7819.33) 15404.67,7863 cw(c15404.67,7906.67) Z1.2@15373.79,7875.79 ; Z2.2@15394,7644 15433.83,7644 ; Z2.2@15412.48,7633.24 cw(c15433.83,7617.44) 15433.83,7644 ; Z2.2@15412.48,7654.76 ccw(c15433.83,7670.56) 15433.83,7644 ; 13059,7979 13383,7979 ; 13250,7546.5 13250,7598 13383,7731 13383,7979 ; 13383,7979 13563.85,7979 ; 13563.85,7979 13580,7979 13641,8040 13641,8208 ; 14801,8718 14813,8718 ; 14813,8718 15322,8718 15361,8679 15361,8276 ; 15361,8276 Z1.2@15361,7863 15426,7863 15447,7842 15447,7657.17 15433.83,7644
  Bottom Layer w20: 13657,7456 U1.2@13702,7456
  Bottom Layer w30: v1(13249,7473) 13249,7389 13285,7353 13907,7353 13941.74,7318.26 J1.1@13941.74,7282.47 ; J1.1@13931.46,7292.74 ccw(c13906.66,7317.54) 13941.74,7317.54 ccw(c13976.81,7317.54) J1.1@13952.01,7292.74 ; 13942.84,7317.16 cw(c13908.15,7282.47) J1.1@13957.21,7282.47 ; v1(13973,8022) v1@14363,8022
  other v1: 13406,7075 14999,7170 15210,7283 14585,7337 14916,7369 15053,7372 14215,7440 14622,7476 14330,7526 14970,7553 14700,7675 14875,7681 14994,7916 15220,8018 14630,8037 15413,8255 14239,8791 13771,8887 13977,8928
HW-POWER: D2.2 P3.8 | length 1196
  Top Layer w10: D2.2@13882.56,8985 ccw(c13939.44,8985) 13899.22,8944.78 ; D2.2@13890,8985 13890,8954 14160,8684 v1(14160,8682) ; D2.2@13892.56,8985 ccw(c13973.58,8985) 13916.29,8927.71 ; D2.2@13902.56,8985 ccw(c14007.72,8985) 13933.36,8910.64 ; D2.2@13912.56,8985 ccw(c14041.86,8985) 13950.43,8893.57 ; 14145.78,8698.22 cw(c14129.57,8682) v1@14152.5,8682 ; 14150.61,8693.39 ccw(c14160,8702.78) v1@14160,8689.5
  Bottom Layer w10: v1@14160,8674.5 cw(c14160,8656.39) 14172.8,8669.2 cw(c14185.61,8682) v1@14167.5,8682 ; v1(14160,8682) 14192,8650 14192,8452 14258.63,8385.37 P3.8@14353,8385.37
HW-RECEIVE: D2.1 P3.9 R5.1 | length 1438.7
  Top Layer w10: v1(13911.57,8743) 14000,8743 14271.22,8471.78 v1(14271.22,8359.78) ; v1@13916.87,8737.7 cw(c13929.67,8724.89) 13929.67,8743 cw(c13929.67,8761.11) v1@13916.87,8748.3 ; v1@14265.92,8365.08 ccw(c14253.11,8377.89) 14271.22,8377.89 ccw(c14289.33,8377.89) v1@14276.52,8365.08
  Bottom Layer w10: D2.1@13867.44,9085 cw(c13812.98,9085) 13851.49,9046.49 cw(c13890,9007.98) D2.1@13890,9062.44 ; D2.1@13877.44,9085 cw(c13847.12,9085) 13868.56,9063.56 cw(c13890,9042.12) D2.1@13890,9072.44 ; D2.1@13890,9085 13841,9036 13841,8892 13911.57,8821.43 R5.1@13911.57,8693.85 ; R5.1@13900.96,8705.46 ccw(c13875.35,8731.07) 13911.57,8731.07 ccw(c13947.78,8731.07) R5.1@13922.17,8705.46 ; v1@13906.26,8737.7 cw(c13893.46,8724.89) 13911.57,8724.89 cw(c13929.67,8724.89) v1@13916.87,8737.7 ; v1@13906.26,8748.3 ccw(c13893.46,8761.11) 13911.57,8761.11 ccw(c13929.67,8761.11) v1@13916.87,8748.3 ; v1(14271.22,8359.78) P3.9@14353,8359.78 ; v1@14276.52,8354.48 cw(c14289.33,8341.67) 14289.33,8359.78 cw(c14289.33,8377.89) v1@14276.52,8365.08
HW-SEND: P3.10 R4.1 | length 1025.9
  Top Layer w10: v1@13832,8818 13947.63,8818 14296,8469.63 v1(14296,8334.19) ; v1@13835.3,8812.7 cw(c13848.11,8799.89) 13848.11,8818 cw(c13848.11,8836.11) v1@13835.3,8823.3 ; v1@14290.7,8339.49 ccw(c14277.89,8352.3) 14296,8352.3 ccw(c14314.11,8352.3) v1@14301.3,8339.49
  Bottom Layer w10: R4.1@13821.25,8774.04 ccw(c13795.64,8799.65) 13831.85,8799.65 ccw(c13868.07,8799.65) R4.1@13842.46,8774.04 ; v1@13824.7,8812.7 cw(c13807.42,8795.42) 13831.85,8795.42 ; R4.1@13831.85,8763.43 v1@13831.85,8816.15 ; 13831.85,8804.37 cw(c13843.63,8804.37) v1@13835.3,8812.7 ; v1@14294.19,8334.19 v1(14296,8334.19) P3.10@14353,8334.19 ; v1@14301.3,8328.89 cw(c14314.11,8316.08) 14314.11,8334.19 cw(c14314.11,8352.3) v1@14301.3,8339.49
  other v1: 13830,8818
IRQ: U2.2
LOCKALARM: D4.2 P1.3 | length 621.4
  Bottom Layer w10: P1.3@14335.5,7126.5 14395.86,7186.87 D4.2@14632.05,7186.87 ; P1.3@14335.5,7141.03 ccw(c14335.5,7176.1) 14360.3,7151.3 ccw(c14385.1,7126.5) P1.3@14350.02,7126.5 ; P1.3@14335.5,7151.03 ccw(c14335.5,7210.24) 14377.37,7168.37 ccw(c14419.24,7126.5) P1.3@14360.02,7126.5 ; D4.2@14614.37,7169.19 ccw(c14571.7,7126.51) 14571.7,7186.87 ccw(c14571.7,7247.22) D4.2@14614.37,7204.54 ; D4.2@14621.45,7176.26 ccw(c14595.84,7150.65) 14595.84,7186.87 ccw(c14595.84,7223.08) D4.2@14621.45,7197.47
LOCKINSIDE: D1.2 P1.5 | length 775.2
  Bottom Layer w10: P1.5@14178.02,7101.97 cw(c14178.02,7042.76) 14219.89,7084.63 cw(c14261.76,7126.5) P1.5@14202.54,7126.5 ; P1.5@14178.02,7111.97 cw(c14178.02,7076.9) 14202.82,7101.7 cw(c14227.62,7126.5) P1.5@14192.54,7126.5 ; P1.5@14178.02,7126.5 14229.65,7074.87 D1.2@14632.05,7074.87 ; D1.2@14614.37,7057.19 ccw(c14571.7,7014.51) 14571.7,7074.87 ccw(c14571.7,7135.22) D1.2@14614.37,7092.54 ; D1.2@14621.45,7064.26 ccw(c14595.84,7038.65) 14595.84,7074.87 ccw(c14595.84,7111.08) D1.2@14621.45,7085.47
MACHINEKEY: D6.2 P1.1 | length 711.8
  Bottom Layer w10: P1.1@14492.98,7126.5 14833.42,7126.5 D6.2@14884.05,7075.87 ; P1.1@14503.25,7116.23 cw(c14528.05,7091.43) 14528.05,7126.5 cw(c14528.05,7161.57) P1.1@14503.25,7136.77 ; P1.1@14510.32,7109.16 cw(c14552.19,7067.28) 14552.19,7126.5 cw(c14552.19,7185.71) P1.1@14510.32,7143.84 ; D6.2@14859.05,7075.87 ccw(c14798.7,7075.87) 14841.37,7118.54 ccw(c14884.05,7161.22) D6.2@14884.05,7100.87 ; D6.2@14869.05,7075.87 ccw(c14832.84,7075.87) 14858.45,7101.47 ccw(c14884.05,7127.08) D6.2@14884.05,7090.87
MFPOWER: P3.19 R7.1 | length 827.3
  Bottom Layer w10: R7.1@13681.57,7911.85 13737.85,7911.85 13801,7975 13801,8268.63 13866.56,8334.19 P3.19@14105,8334.19 ; R7.1@13692.17,7901.25 cw(c13717.78,7875.64) 13717.78,7911.85 cw(c13717.78,7948.07) R7.1@13692.17,7922.46
MISO: P3.14 R18.2 | length 178.2
  Bottom Layer w10: P3.14@14353,8231.83 14393.17,8231.83 14427.57,8197.43 ; R18.2@14451.48,8187.13 ccw(c14427.57,8164.52) 14427.57,8197.43 ; R18.2@14451.48,8207.74 cw(c14427.57,8230.35) 14427.57,8197.43 ; R18.2@14463.39,8197.43 14427.57,8197.43
MISO1: C18.1 R18.1 U2.12 | length 2002
  Top Layer w10: v1@15159.7,7332.3 ccw(c15146.89,7345.11) 15165,7345.11 ccw(c15183.11,7345.11) v1@15170.3,7332.3 ; v1@15159.7,8210.7 cw(c15146.89,8197.89) 15165,8197.89 cw(c15183.11,8197.89) v1@15170.3,8210.7 ; v1(15165,7327) v1(15165,8216)
  Bottom Layer w10: R18.1@14537.85,8197.43 14576.43,8197.43 14599,8220 15137,8220 15141,8216 v1(15165,8216) ; R18.1@14549.46,8186.83 cw(c14575.07,8161.22) 14575.07,8197.43 cw(c14575.07,8233.65) R18.1@14549.46,8208.04 ; C18.1@15091.85,7261.43 15143.43,7261.43 15165,7283 v1(15165,7327) U2.12@15165,7379 ; C18.1@15103.46,7250.83 cw(c15129.07,7225.22) 15129.07,7261.43 cw(c15129.07,7297.65) C18.1@15103.46,7272.04 ; U2.12@15157.4,7371.4 cw(c15139.05,7353.05) 15165,7353.05 cw(c15190.95,7353.05) U2.12@15172.6,7371.4 ; v1@15159.7,7321.7 cw(c15146.89,7308.89) 15165,7308.89 cw(c15183.11,7308.89) v1@15170.3,7321.7 ; v1@15159.7,7332.3 ccw(c15146.89,7345.11) 15165,7345.11 ccw(c15183.11,7345.11) v1@15170.3,7332.3 ; v1@15159.7,8210.7 ccw(c15146.89,8197.89) 15146.89,8216 ccw(c15146.89,8234.11) v1@15159.7,8221.3
MOSI: P3.13 R16.2 | length 167.3
  Bottom Layer w10: P3.13@14353,8257.42 R16.2@14463.37,8257.42 ; 14423.72,8257.42 ccw(c14423.72,8297.1) R16.2@14451.78,8269.04 ; 14428.63,8257.42 cw(c14428.63,8224.68) R16.2@14451.78,8247.83
MOSI1: C16.1 R16.1 U2.14 | length 2398.7
  Top Layer w10: v1(14701.15,7332) 14702.65,7333.5 14872.88,7333.5 14874.38,7332 15090,7332 15119,7361 15119,8098 15064,8153 v1@15064,8241 ; v1@14706.45,7326.7 cw(c14722.87,7310.27) 14722.87,7333.5 ; v1@14706.45,7337.3 ccw(c14715.63,7346.49) 14715.63,7333.5 ; v1@15057.7,8238.7 cw(c15042.48,8223.48) 15064,8223.48 ; 15064,8228.31 cw(c15078.69,8228.31) v1@15068.3,8238.7
  Bottom Layer w10: R16.1@14537.85,8258.43 14647.57,8258.43 14664,8242 15059,8242 v1@15062,8245 ; R16.1@14549.46,8247.83 cw(c14575.07,8222.22) 14575.07,8258.43 cw(c14575.07,8294.65) R16.1@14549.46,8269.04 ; C16.1@14690.54,7291.17 ccw(c14664.93,7316.78) 14701.15,7316.78 ccw(c14737.36,7316.78) C16.1@14711.75,7291.17 ; v1@14695.84,7326.7 cw(c14683.04,7313.89) 14701.15,7313.89 cw(c14719.25,7313.89) v1@14706.45,7326.7 ; v1@14695.84,7337.3 ccw(c14683.04,7350.11) 14701.15,7350.11 ccw(c14719.25,7350.11) v1@14706.45,7337.3 ; C16.1@14701.15,7280.57 v1(14701.15,7332) 14701.15,7383.15 14747,7429 U2.14@14787.05,7429 ; 14719.82,7401.82 cw(c14759.49,7362.16) U2.14@14759.49,7418.25 ; 14736.89,7418.89 cw(c14759.49,7396.3) U2.14@14759.49,7428.25 ; 15040.07,8242 ccw(c15040.07,8266.93) v1@15057.7,8249.3 ; 15049.72,8242 cw(c15049.72,8230.72) v1@15057.7,8238.7
  other v1: 15063,8244
NetC21_1: C21.1 R22.1 | length 237.3
  Bottom Layer w15: C21.1@14511.14,7556.1 ccw(c14481.26,7585.97) 14523.51,7585.97 ccw(c14565.76,7585.97) C21.1@14535.89,7556.1 ; R22.1@14513.11,7637.9 cw(c14488.01,7612.8) 14523.51,7612.8 ; C21.1@14523.51,7543.72 R22.1@14523.51,7648.3 ; 14523.51,7603.26 cw(c14572.51,7603.26) R22.1@14537.86,7637.9
NetC24_1: C24.1 D7.2 U4.8 V1.1 | length 940.1
  Bottom Layer w15: D7.2@14458.81,8862.38 cw(c14435.42,8833.13) 14472.87,8833.13 ; D7.2@14472.87,8879.95 14472.87,8833.13 ; D7.2@14486.92,8862.38 ccw(c14510.32,8833.13) 14472.87,8833.13 ; 14603,8811.36 14494.64,8811.36 14472.87,8833.13 ; V1.1@14642.52,8801.35 ccw(c14618.35,8777.19) 14618.35,8811.36 ccw(c14618.35,8845.53) V1.1@14642.52,8821.37 ; V1.1@14652.52,8811.36 14608,8811.36 14608,8534 14635.43,8506.57 14701,8506.57 ; U4.8@14701,8426 14701,8506.57 ; C24.1@14770.31,8497.73 ccw(c14748.97,8476.39) 14748.97,8506.57 ccw(c14748.97,8536.74) C24.1@14770.31,8515.4 ; C24.1@14780.15,8506.57 14701,8506.57
NetC25_1: C25.1 C26.2 L1.2 | length 456.6
  Bottom Layer w20: C25.1@14407.91,7555.33 ccw(c14382.3,7580.93) 14418.51,7580.93 ccw(c14454.73,7580.93) C25.1@14429.12,7555.33 ; C26.2@14410.67,7643.91 cw(c14391.74,7624.98) 14418.51,7624.98 ; C26.2@14410.67,7675.12 ccw(c14385.07,7700.73) 14421.28,7700.73 ccw(c14457.49,7700.73) C26.2@14431.89,7675.12 ; L1.2@14410.98,7760.04 cw(c14386.1,7735.17) 14421.28,7735.17 ; C25.1@14418.51,7544.72 C26.2@14418.51,7656.75 ; 14418.51,7611.62 cw(c14464.17,7611.62) C26.2@14431.89,7643.91 ; C26.2@14421.28,7659.51 L1.2@14421.28,7774.28 ; 14421.28,7731.68 cw(c14461.38,7731.68) L1.2@14433.02,7760.04
NetC28_1: C28.1 C29.1 L2.2 | length 437.1
  Bottom Layer w20: C29.1@14130.91,7563.33 ccw(c14105.3,7588.93) 14141.51,7588.93 ccw(c14177.73,7588.93) C29.1@14152.12,7563.33 ; C28.1@14132.67,7643.91 cw(c14111.33,7622.56) 14141.51,7622.56 ; C28.1@14132.67,7675.12 ccw(c14107.07,7700.73) 14143.28,7700.73 ccw(c14179.49,7700.73) C28.1@14153.89,7675.12 ; L2.2@14134.98,7747.04 cw(c14114.93,7726.99) 14143.28,7726.99 ; C29.1@14141.51,7552.72 14141.51,7657.75 C28.1@14143.28,7659.51 L2.2@14143.28,7759.28 ; 14141.51,7614.04 cw(c14183.76,7614.04) C28.1@14153.88,7643.91 ; 14143.28,7713.85 cw(c14190.21,7713.85) L2.2@14157.02,7747.04
NetD3_1: D3.1 N1.C | length 659.7
  Bottom Layer w10: D3.1@13691,9085 13733.5,9042.5 ; D3.1@13691.74,9068.52 cw(c13693.29,9034.37) 13717.46,9058.54 cw(c13741.63,9082.71) D3.1@13707.48,9084.26 ; D3.1@13692.19,9058.53 cw(c13694.67,9003.68) 13733.49,9042.51 ; D3.1@13717.47,9083.81 ccw(c13772.32,9081.33) 13733.49,9042.51 ; N1.C@13727.81,8666.19 ccw(c13705.62,8688.38) 13737,8688.38 ccw(c13768.38,8688.38) N1.C@13746.19,8666.19 ; N1.C@13737,8657 13737,8698 13715,8720 13715,8899 13733.5,8917.5 13733.5,9042.5
NetD3_2: D3.2 R2.1 | length 843.5
  Bottom Layer w10: D3.2@13672.26,8966.26 cw(c13653.59,8947.59) 13680,8947.59 ; 13680,8894.48 cw(c13781.52,8894.48) D3.2@13709.74,8966.26 ; 13680,8918.62 cw(c13757.38,8918.62) D3.2@13702.66,8973.34 ; 13680,8942.76 cw(c13733.24,8942.76) D3.2@13695.59,8980.41 ; D3.2@13686,8980 13680,8974 13680,8617.23 13683.5,8613.73 13683.5,8594.27 13680,8590.77 13680,8459 13715.76,8423.24 ; R2.1@13730.51,8415.16 ccw(c13715.76,8405.74) 13715.76,8423.24 ; R2.1@13730.51,8431.32 cw(c13715.76,8440.74) 13715.76,8423.24 ; R2.1@13744.15,8423.24 13715.76,8423.24
NetD7_1: D7.1 R20.1 | length 263.8
  Bottom Layer w15: D7.1@14472.87,8744.95 14514.05,8744.95 ; D7.1@14491.8,8732.79 cw(c14514.05,8718.51) 14514.05,8744.95 ; D7.1@14491.8,8757.1 ccw(c14514.05,8771.39) 14514.05,8744.95 ; R20.1@14529.01,8641.27 ccw(c14507.68,8662.61) 14537.85,8662.61 ccw(c14568.03,8662.61) R20.1@14546.69,8641.27 ; R20.1@14537.85,8632.43 14537.85,8721.15 14514.05,8744.95
NetLS1_1: LS1.1 R13.2 | length 246.4
  Bottom Layer w20: R13.2@13131.43,7737.61 13262.92,7737.61 LS1.1@13263.76,7738.45 ; R13.2@13138.51,7730.54 cw(c13155.58,7713.47) 13155.58,7737.61 cw(c13155.58,7761.76) R13.2@13138.51,7744.69 ; 13213.45,7737.61 ccw(c13213.45,7788.75) LS1.1@13249.61,7752.59 ; 13217.49,7737.61 cw(c13217.49,7692.18) LS1.1@13249.61,7724.31
NetLS1_2: LS1.2 Q3.2 | length 229.9
  Bottom Layer w15: LS1.2@13503.75,7754.36 ccw(c13465.34,7792.77) 13519.66,7792.77 ccw(c13573.98,7792.77) LS1.2@13535.57,7754.36 ; Q3.2@13512.3,7828.27 cw(c13494.52,7810.49) 13519.66,7810.49 ; LS1.2@13519.66,7738.45 Q3.2@13519.66,7835.64 ; 13519.66,7803.37 cw(c13554.87,7803.37) Q3.2@13529.97,7828.27
NetN1_B: N1.B R4.2 | length 243.9
  Bottom Layer w10: R4.2@13746.78,8752.83 cw(c13721.17,8727.22) 13757.39,8727.22 cw(c13793.6,8727.22) R4.2@13767.99,8752.83 ; R4.2@13757.39,8763.43 13757.39,8712.61 13775,8695 N1.B@13837,8695 ; N1.B@13816.28,8685.81 ccw(c13794.09,8663.62) 13794.09,8695 ccw(c13794.09,8726.38) N1.B@13816.28,8704.19
NetQ1_1: Q1.1 R7.2 | length 209.7
  Bottom Layer w15: R7.2@13672.73,7827.55 cw(c13650.6,7805.42) 13681.89,7805.42 ; Q1.1@13673.05,7730.97 ccw(c13651.71,7752.31) 13681.89,7752.31 ccw(c13712.07,7752.31) Q1.1@13690.73,7730.97 ; Q1.1@13681.89,7722.14 R7.2@13681.89,7837.06 ; 13681.89,7806.99 cw(c13710.96,7806.99) R7.2@13690.4,7827.55
NetQ1_3: Q1.3 R6.2 | length 241.4
  Bottom Layer w15: R6.2@13502.32,7624.57 13580.46,7624.57 13601.89,7646 Q1.3@13601.89,7684.13 ; R6.2@13512.15,7615.73 cw(c13533.49,7594.39) 13533.49,7624.57 cw(c13533.49,7654.74) R6.2@13512.15,7633.4 ; Q1.3@13593.05,7675.3 cw(c13571.71,7653.96) 13601.89,7653.96 cw(c13632.07,7653.96) Q1.3@13610.73,7675.3
NetQ2_3: Q2.3 R12.2 | length 246.9
  Bottom Layer w10: R12.2@13818.61,8549.24 13888.76,8549.24 13902.89,8535.11 Q2.3@13902.89,8492.13 ; R12.2@13830.22,8538.64 cw(c13855.83,8513.03) 13855.83,8549.24 cw(c13855.83,8585.46) R12.2@13830.22,8559.85 ; Q2.3@13892.28,8502.74 ccw(c13866.68,8528.35) 13902.89,8528.35 ccw(c13939.1,8528.35) Q2.3@13913.5,8502.74
NetR1_1: R1.1 S1.2 | length 871.5
  Bottom Layer w10: S1.2@14106,8719 S1.2@14336.7,8719 14390,8719 14399,8728 14399,8944 14418,8963 14418,8986 14404.43,8999.57 R1.1@14404.43,9090.15 ; S1.2@14137.34,8710.16 cw(c14158.68,8688.82) 14158.68,8719 cw(c14158.68,8749.18) S1.2@14137.34,8727.84 ; S1.2@14305.37,8710.16 ccw(c14284.03,8688.82) 14284.03,8719 ccw(c14284.03,8749.18) S1.2@14305.37,8727.84 ; S1.2@14368.04,8710.16 cw(c14389.38,8688.82) 14389.38,8719 cw(c14389.38,8749.18) S1.2@14368.04,8727.84 ; R1.1@14393.83,9078.54 cw(c14368.22,9052.93) 14404.43,9052.93 cw(c14440.65,9052.93) R1.1@14415.04,9078.54
NetR3_2: R3.2 R6.1 Tr1.1 | length 323.1
  Bottom Layer w15: Tr1.1@13418.03,7500.73 ccw(c13396.69,7522.07) 13426.86,7522.07 ccw(c13457.04,7522.07) Tr1.1@13435.7,7500.73 ; R3.2@13418.55,7551.6 cw(c13398.47,7531.52) 13426.86,7531.52 ; R3.2@13419.55,7569.27 ccw(c13398.21,7590.61) 13428.39,7590.61 ccw(c13458.56,7590.61) R3.2@13437.22,7569.27 ; R6.1@13420.01,7615.73 cw(c13399.78,7595.5) 13428.39,7595.5 ; Tr1.1@13426.86,7491.89 13426.86,7558.91 R3.2@13428.39,7560.43 13428.39,7624.03 R6.1@13427.85,7624.57 ; 13426.86,7529 cw(c13458.82,7529) R3.2@13436.22,7551.6 ; 13428.39,7593.27 cw(c13460.14,7593.27) R6.1@13437.69,7615.73
NetR21_2: R21.2 VL1.1 | length 375.8
  Top Layer w10: VL1.1@14343.49,8971.81 v1@14392.81,8971.81 ; VL1.1@14357.63,8957.67 cw(c14391.77,8923.53) 14391.77,8971.81 cw(c14391.77,9020.09) VL1.1@14357.63,8985.95 ; 14373.02,8971.81 ccw(c14373.02,8993.98) v1@14388.7,8978.3 ; 14378.77,8971.81 cw(c14378.77,8957.77) v1@14388.7,8967.7
  Bottom Layer w10: R21.2@14333.96,9077.78 cw(c14308.35,9052.17) 14344.57,9052.17 cw(c14380.78,9052.17) R21.2@14355.17,9077.78 ; R21.2@14344.57,9089.39 14344.57,9022.43 v1(14394,8973) ; v1@14386.5,8973 ccw(c14368.39,8973) 14381.2,8985.8 ccw(c14394,8998.61) v1@14394,8980.5
NetR23_2: R23.2 VL2.1 | length 405.5
  Top Layer w10: VL2.1@14104.49,8969.81 v1(14148,8969.81) ; VL2.1@14119.67,8956.79 cw(c14148,8932.48) v1(14148,8969.81) ; VL2.1@14119.67,8982.83 ccw(c14148,9007.14) v1(14148,8969.81) ; v1@14142.7,8964.51 ccw(c14129.89,8951.7) 14129.89,8969.81 ccw(c14129.89,8987.92) v1@14142.7,8975.11
  Bottom Layer w10: v1@14153.3,8964.51 cw(c14166.57,8951.24) 14166.57,8970 ; v1@14153.3,8975.11 ccw(c14165.65,8987.46) 14165.65,8970 ; v1@14154.15,8974.1 ccw(c14162,8979.56) 14162,8970 ; v1@14154.33,8965.79 cw(c14162,8960.91) 14162,8970 ; R23.2@14211.96,9077.78 cw(c14186.35,9052.17) 14222.57,9052.17 cw(c14258.78,9052.17) R23.2@14233.17,9077.78 ; R23.2@14222.57,9089.39 14222.57,8994.57 14198,8970 14162,8970
NetR26_2: R26.2 VL3.1 | length 371.6
  Top Layer w10: VL3.1@14220.49,8969.81 v1@14282.81,8969.81 ; VL3.1@14234.63,8955.67 cw(c14268.77,8921.53) 14268.77,8969.81 cw(c14268.77,9018.09) VL3.1@14234.63,8983.95 ; 14263.63,8969.81 ccw(c14263.63,8990.5) v1@14278.26,8975.87 ; 14267.28,8969.81 cw(c14267.28,8954.28) v1@14278.26,8965.26
  Bottom Layer w10: R26.2@14272.96,9077.78 cw(c14247.35,9052.17) 14283.57,9052.17 cw(c14319.78,9052.17) R26.2@14294.17,9077.78 ; v1@14278.26,8975.87 ccw(c14265.46,8988.67) 14283.57,8988.67 ccw(c14301.67,8988.67) v1@14288.87,8975.87 ; v1@14283,8970 v1(14283.57,8970.57) R26.2@14283.57,9089.39
NetR28_2: R28.2 R29.2 U5.1 | length 290.8
  Bottom Layer w10: U5.1@13384,8174 13441,8174 13453,8186 13489.39,8186 ; U5.1@13414.95,8169.05 cw(c13426.9,8157.1) 13426.9,8174 cw(c13426.9,8190.9) U5.1@13414.95,8178.95 ; R29.2@13479.67,8207.01 cw(c13461.82,8186) 13489.39,8186 ; R28.2@13480.21,8167.3 ccw(c13465.75,8186) 13489.39,8186 ; R28.2@13489.39,8155.43 13489.39,8186 ; R29.2@13489.39,8218.43 13489.39,8186 ; R28.2@13498.56,8167.3 cw(c13513.02,8186) 13489.39,8186 ; R29.2@13499.1,8207.01 ccw(c13516.95,8186) 13489.39,8186